# Altium PCB PCB1还未布线.PcbDoc
Units mm, origin at the board's own origin, x right, y up, seen from the top; angles counter-clockwise.
Board outline 152.4 x 101.6 mm, 2 copper layers (Top Layer, Bottom Layer); 15 components, 11 nets, 37 pads, 2 vias.
Unrouted connection lines stored in the file: 26.
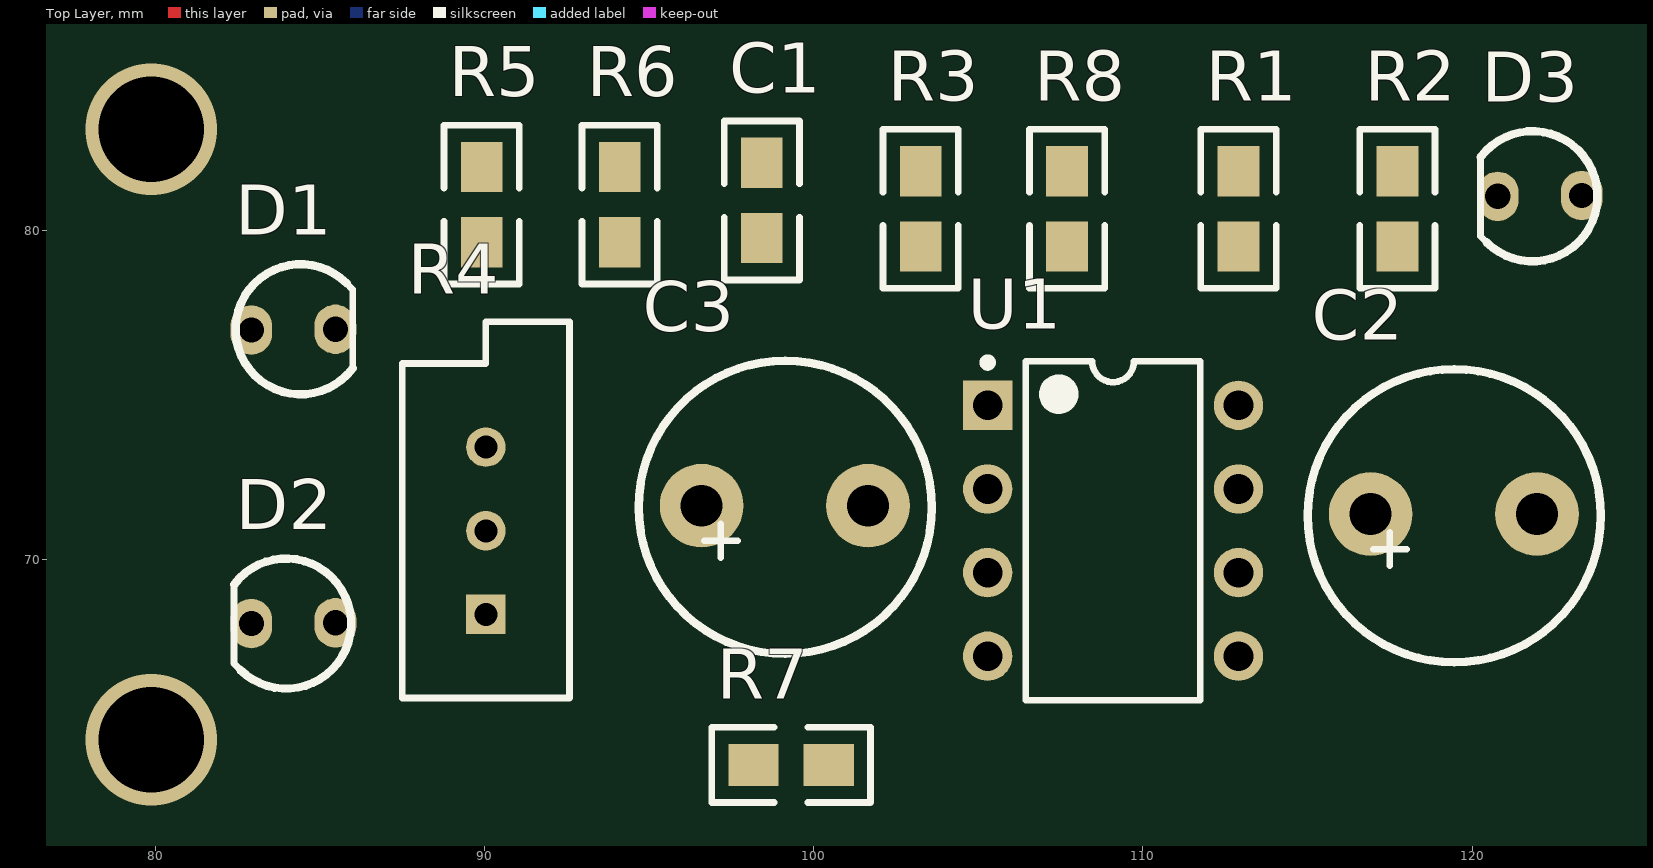
[diagram p0: Top Layer view]
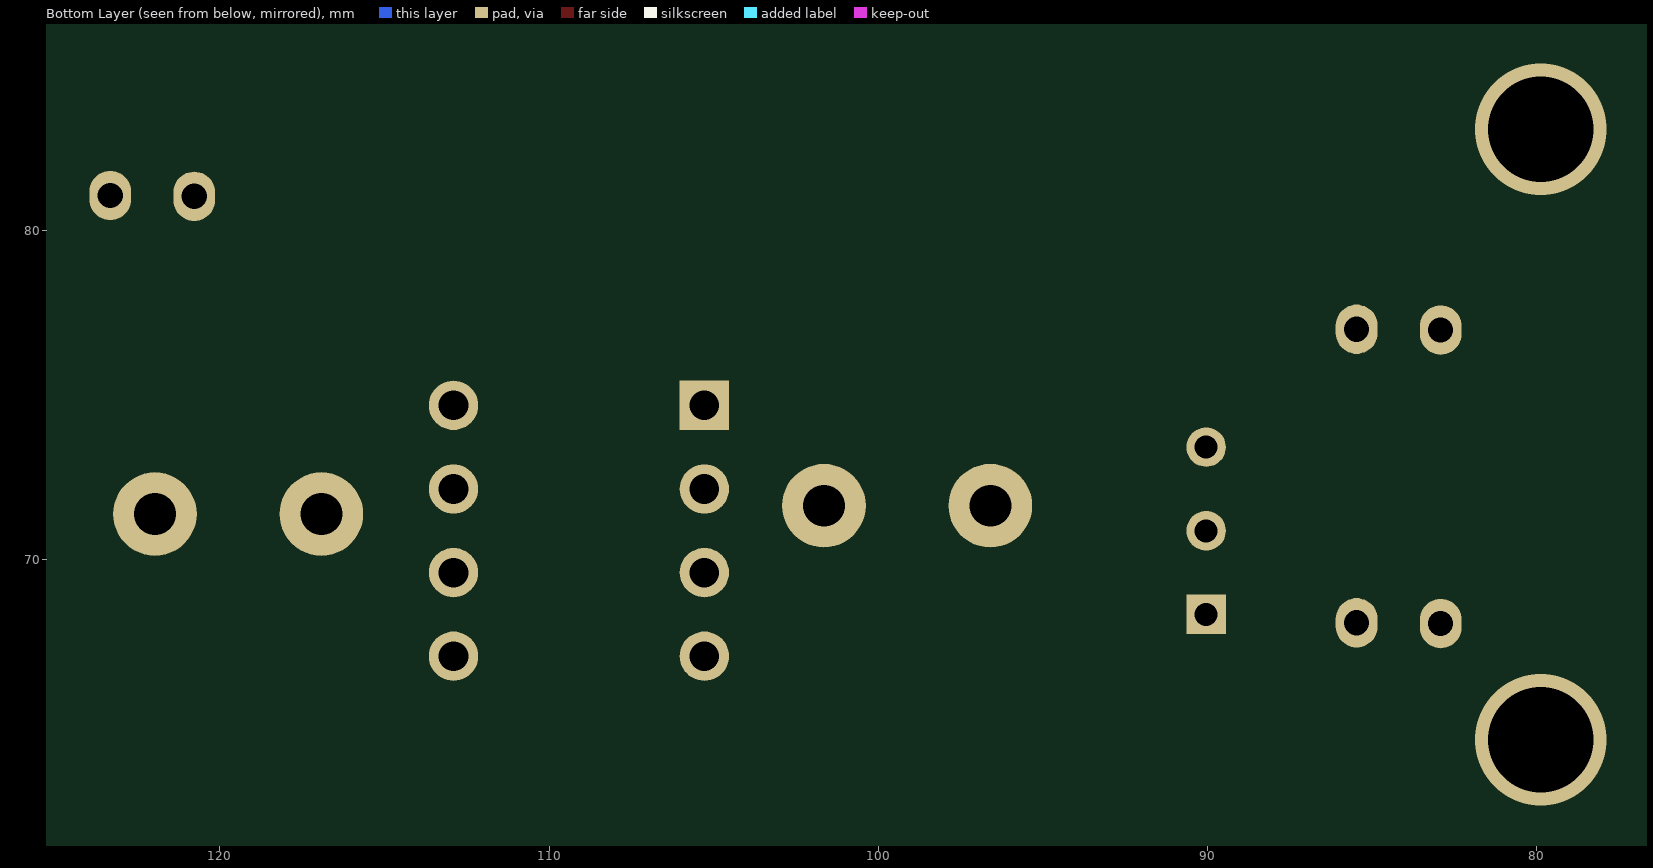
[diagram p1: Bottom Layer view, seen from below]

## Layer stack, top to bottom
Top Solder: solder mask 0.0102, Solder Resist, Dk 3.5
Top Layer: signal copper 0.0356
Dielectric 1: dielectric 0.32, FR-4, Dk 4.8
Bottom Layer: signal copper 0.0356
Bottom Solder: solder mask 0.0102, Solder Resist, Dk 3.5

## Board outline
25.4,25.4 177.8,25.4 177.8,127 25.4,127

## Design rules (kind name [scope] priority, off if disabled: settings)
Clearance [All] p1: gap=0.254 ignorepadtopadclearanceinfootprint=FALSE except(0: Arc-Hole Track-Hole SMDPad-Hole THPad-Hole Via-Hole Fill-Hole Poly-Hole Region-Hole Text-Hole)
PolygonConnect [All] p1: connectstyle=Relief reliefconductorwidth=0.254 reliefentries=4 polygonreliefangle="90 Angle" airgapwidth=0.254
RoomDefinition Sheet1 [InComponentClass('Sheet1')] p1: confinementstyle=ConfineIn formatcopy=TRUE lockcomponents=FALSE outline 76.454,61.087 125.476,61.087 125.476,86.589 76.454,86.589
RoutingVias [All] p1: holewidth=0.711 width=1.27 viastyle="Through Hole" minholewidth=0.711 minwidth=1.27 maxholewidth=0.711 maxwidth=1.27
SolderMaskExpansion [All] p1: expansion=0.102
Width [All] p1: maxlimit=0.254 minlimit=0.254 preferedwidth=0.254
30 further rules are at their usual default settings.

## Components (designator, comment, footprint, x,y, rotation, side; value= is the part's Value field where it differs from the comment)
C1 "1uF" 0805 98.425,81.026 r270 top
C2 "1uF/16V" CAPBIG5mm 118.237,71.374 r0 top
C3 "1uF/16V" CAPBIG5mm 97.917,71.628 r0 top
D1 "+5V" LED 82.918,76.962 r0 top
D2 "+5V" LED 85.471,68.072 r180 top
D3 "+5V" LED 123.33,81.051 r180 top
R1 "10K" 0805 112.903,80.772 r270 top
R2 "10K" 0805 117.729,80.772 r270 top
R3 "200K" 0805 103.251,80.518 r90 top
R4 "RPot" VR5 90.043,70.866 r90 top value=10K
R5 "360" 0805 89.916,80.645 r90 top
R6 "20K" 0805 94.107,80.645 r90 top
R7 "63K" 0805 99.187,63.754 r0 top
R8 "10K" 0805 107.696,80.518 r90 top
U1 "LM358N" N08E 109.093,70.866 r0 top

## Footprints (in the part's own frame and the unit in brackets; to place one, negate y for a bottom-side part, rotate by r counter-clockwise, add the part's x,y. Pads: shape width x height; smd on the part's side, far side on the other; paste and mask are expansions set on the pad)
0805 [mil]
  rect 60x50 smd: 1(-40,0) 2(50,0)
  silkscreen extent -90,-45 100,45
CAPBIG5mm [mil]
  round 100 hole 50: 1(-52,0) 2(147,0)
  silkscreen extent -127,-177 223,173
LED [mil]
  oval 50x59.06 hole 30: 1(0,0) 2(100.5,1)
  silkscreen extent -19,-77 121,79
N08E [mm] "DIP, 8-Leads, Row Spacing 7.62mm, Pitch 2.54mm, Body 9.91x6.35mm"
  rect 1.5x1.5 hole 0.9: 1(-3.81,3.81)
  round 1.5 hole 0.9: 2(-3.81,1.27) 3(-3.81,-1.27) 4(-3.81,-3.81) 5(3.81,-3.81) 6(3.81,-1.27) 7(3.81,1.27) 8(3.81,3.81)
  silkscreen extent -3.93,-5.15 2.65,5.23, body extent -3.6,-5.15 3.6,5.15, height 5.34
VR5 [mm] "Thru-Hole; 3 Leads"
  rect 1.2x1.2 hole 0.7: 1(-2.54,0)
  round 1.2 hole 0.7: 2(0,0) 3(2.54,0)
  silkscreen extent -5.08,-2.54 6.35,2.54

## Part data
C1: library part CAP
C2 C3: library part CAPP, "Capacitor"
D1 D2 D3: library part LED
R1 R2 R3 R5 R6 R7 R8: library part RES1
R4: "Potentiometer", LatestRevisionDate=17-Jul-2002, LatestRevisionNote="Re-released for DXP Platform.", PackageDescription="Variable Resistor, Thru-Hole; 3 Leads", PackageReference=VR5, Published=8-Jun-2000, Publisher="Altium Limited", Set Position=0.5, Sim Note="Enter the Resistance value and the set point into parameter fields."
U1: "Low Power Dual Operational Amplifier", DigiKeyPartNumber=LM358NNS-ND, Manufacturer="National Semiconductor", PackageTopMarking=NSUZXYTT*LM*358N, PowerWise=N, Code_JEDEC=MS-001-BA, ComponentLink1Description="LM358 Datasheet", ComponentLink1URL=http://www.national.com/ds/LM/LM358.pdf, ComponentLink2Description="LM358 Web Page", ComponentLink2URL=http://www.national.com/pf/LM/LM358.html, ComponentLink3Description="N08E Package Page", ComponentLink3URL=http://www.national.com/packaging/folders/n08e.html, CompType=Amplifiers, DatasheetVersion=Oct-2005, LatestRevisionDate=13-Jan-2009, LatestRevisionNote="Sim Model Added.", PackageDescription="MDIP, .365 x .250 x .130in, 8 Lead, .100in Pitch", PackageReference=N08E, PackageVersion="revG, May-2006", PartNumber=LM358N, PinCount=8, Published=4-Dec-2008, Publisher="Altium Limited", RoHS=O

## Via types
v1: diameter 4, hole 3.2, Top Layer to Bottom Layer, 2 vias

## Nets (pads, with @x,y where several pads share a name; then routed paths per layer and width w, separated by ;. In a path a pad name is that pad's centre, name@x,y a point inside that pad or via, vN(x,y) a via of type N, cw(c..) or ccw(c..) an arc to the next point about the centre after c; other vN are vias at no path point)
GND: D1.1 D2.2 R1.1 R4.2 R7.2 R8.1 U1.4
NetC1_1: C1.1 C2.1 R3.2 U1.1
NetC1_2: C1.2 R3.1 R4.1 R4.3 U1.2
NetC2_2: C2.2 U1.5
NetC3_1: C3.1 D2.1 R6.1
NetC3_2: C3.2 R7.1 U1.3
NetD1_2: D1.2 R5.1
NetD3_1: D3.1 R8.2
NetD3_2: D3.2 U1.7
NetR1_2: R1.2 R2.1 U1.6
VCC: R2.2 R5.2 R6.2 U1.8
copper on no net:
  other v1: 79.883,64.516 79.883,83.058